# Altium PCB MSP432_MAIN.PcbDoc (part 2 of 2)
Units mil, origin at the board's own origin, x right, y up, seen from the top; angles counter-clockwise.
Board outline 3910 x 2910 mil, 2 copper layers (Top Layer, Bottom Layer); 62 components, 84 nets, 279 pads, 146 vias.
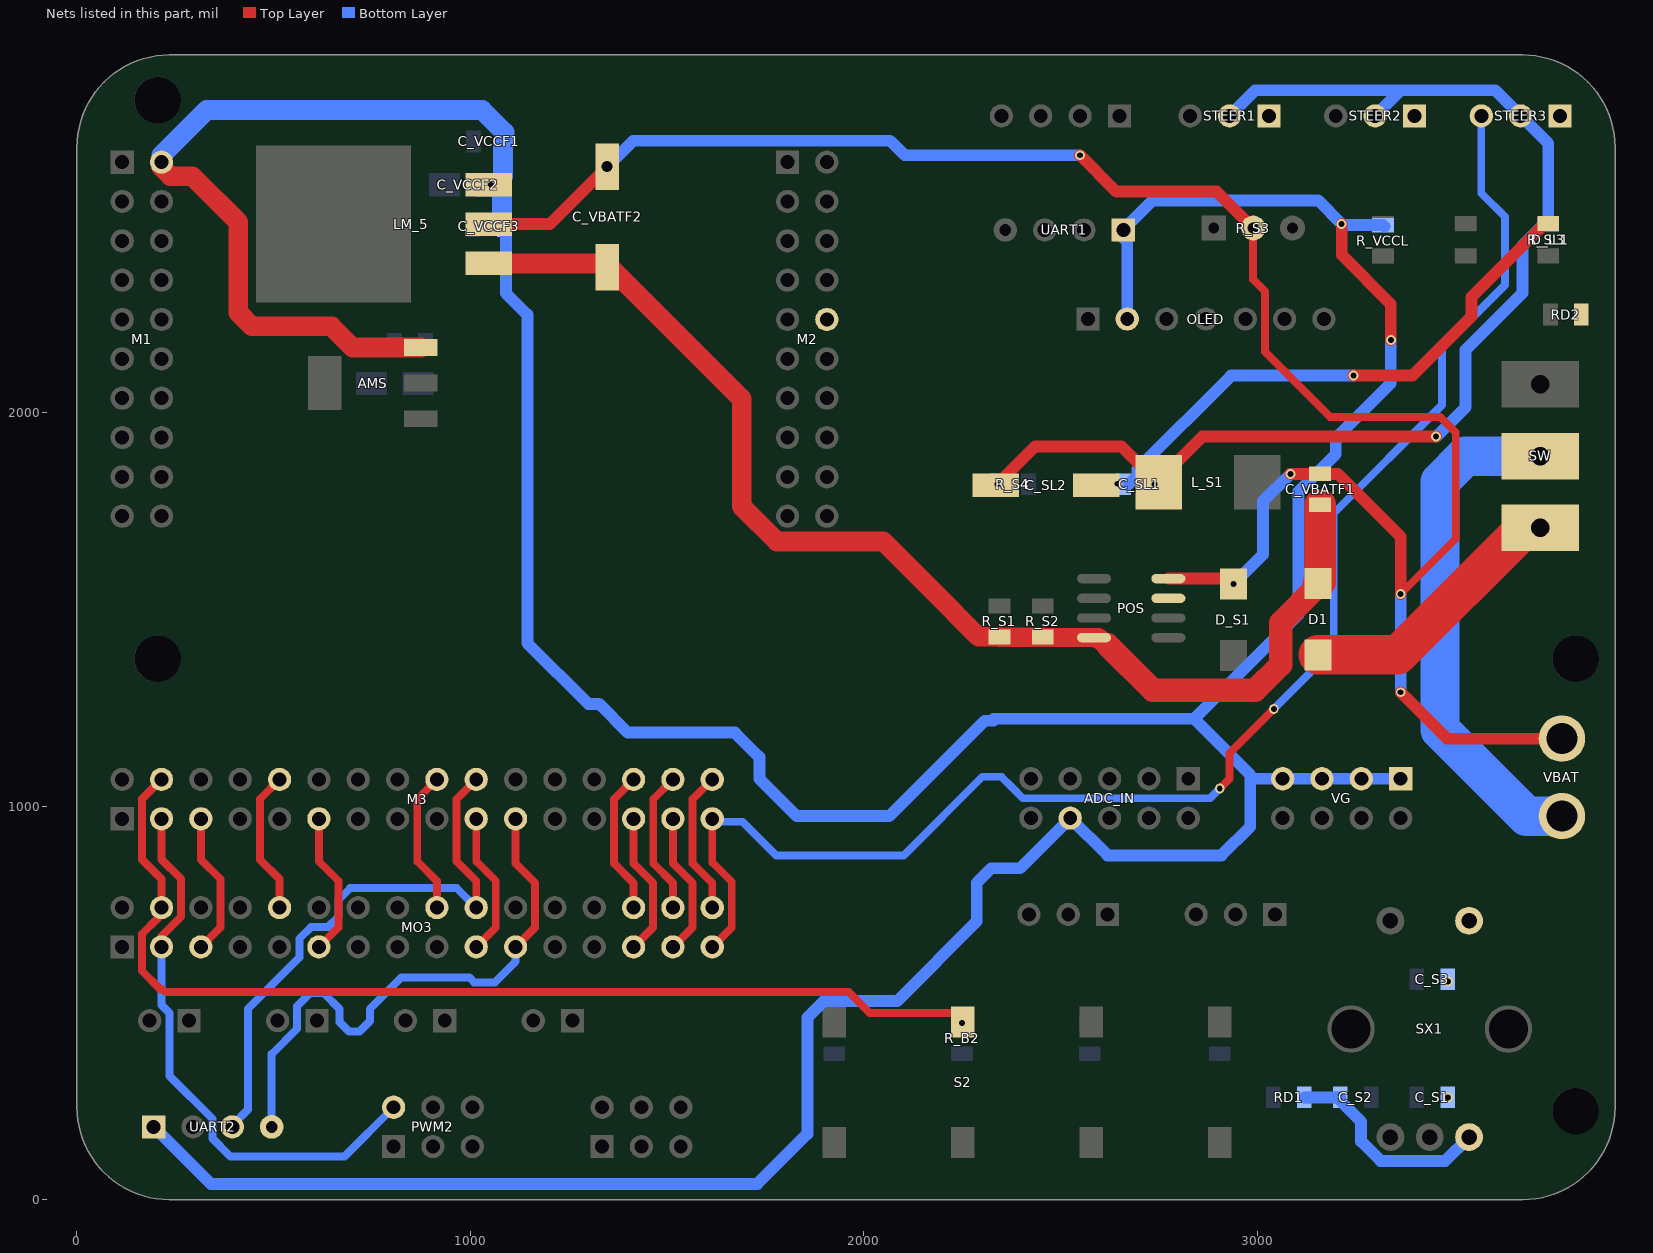
[diagram p2: the nets of this part, all layers, seen from the top]

## Via types
v1: diameter 25, hole 15, Top Layer to Bottom Layer, 145 vias
v2: diameter 50, hole 28, Top Layer to Bottom Layer, 1 vias

## Nets (pads, with @x,y where several pads share a name; then routed paths per layer and width w, separated by ;. In a path a pad name is that pad's centre, name@x,y a point inside that pad or via, vN(x,y) a via of type N, cw(c..) or ccw(c..) an arc to the next point about the centre after c; other vN are vias at no path point) (continued)
P8.7: M3.3 MO3.3 PWM2.2 | length 1438.5
  Top Layer w20: MO3.3@215,642.48 215,670 264.53,719.53 264.53,815.47 215,865 M3.3@215,968.19
  Bottom Layer w20: MO3.3@215,642.48 215,495.04 235.47,474.57 235.47,314.57 344.53,205.52 344.53,155.47 390,110 680,110 PWM2.2@805,235
P9.0: M3.4 MO3.4 R_B2.2 S2.1 | length 2687.9
  Top Layer w20: M3.4@215,1068.19 165.47,1018.66 165.47,864.53 215,815 MO3.4@215,742.48 207.53,735.01 207.53,717.53 165,675 165,582.02 212.49,534.53 217.94,534.53 224.97,527.5 1962.5,527.5 2015,475 2224.37,475 v1(2250,449.37)
P9.1: M3.5 MO3.5 | length 366.7
  Top Layer w20: MO3.5@315,642.48 364.53,692.01 364.53,815.47 315,865 M3.5@315,968.19
P9.2: M3.10 MO3.10 | length 367.1
  Top Layer w20: MO3.10@515,742.48 515,815 465,865 465,1018.19 M3.10@515,1068.19
P9.3: M3.11 MO3.11 | length 366.7
  Top Layer w20: MO3.11@615,642.48 664.53,692.01 664.53,810.47 615,860 M3.11@615,968.19
P9.4: M3.18 MO3.18 | length 367.1
  Top Layer w20: MO3.18@915,742.48 915,810 865,860 865,1018.19 M3.18@915,1068.19
P9.5: M3.19 MO3.19 | length 366.7
  Top Layer w20: MO3.19@1015,642.48 1064.53,692.01 1064.53,810.47 1015,860 M3.19@1015,968.19
P9.6: M3.20 MO3.20 UART2.3 | length 1464.1
  Top Layer w20: MO3.20@1015,742.48 1015,810 965,860 965,1018.19 M3.20@1015,1068.19
  Bottom Layer w20: UART2.3@395,185 395,189.18 435,229.18 435,485 565.47,615.47 565.47,663 595.43,692.95 637.95,692.95 664.53,719.53 664.53,762.05 694.49,792.01 965.47,792.01 MO3.20@1015,742.48
P9.7: M3.21 MO3.21 UART2.4 | length 1468.5
  Top Layer w20: MO3.21@1115,642.48 1164.53,692.01 1164.53,805.33 1115,854.86 M3.21@1115,968.19
  Bottom Layer w20: UART2.4@495,185 495,369.96 559.53,434.48 559.53,491.87 592.66,525 627.34,525 667.44,484.9 667.44,451.6 691.54,427.5 718.46,427.5 745,454.04 745,485 824.53,564.53 997.66,564.53 1009.69,552.5 1062.5,552.5 1115,605 MO3.21@1115,642.48
P10.0: M3.28 MO3.28 | length 367.1
  Top Layer w20: MO3.28@1415,742.48 1415,805 1365,855 1365,1018.19 M3.28@1415,1068.19
P10.1: M3.27 MO3.27 | length 366.7
  Top Layer w20: MO3.27@1415,642.48 1464.53,692.01 1464.53,805.47 1415,855 M3.27@1415,968.19
P10.2: M3.30 MO3.30 | length 367.1
  Top Layer w20: MO3.30@1515,742.48 1515,805 1465,855 1465,1018.19 M3.30@1515,1068.19
P10.3: M3.29 MO3.29 | length 366.7
  Top Layer w20: MO3.29@1515,642.48 1564.53,692.01 1564.53,805.47 1515,855 M3.29@1515,968.19
P10.4: M3.32 MO3.32 | length 367.1
  Top Layer w20: MO3.32@1615,742.48 1615,805 1565,855 1565,1018.19 M3.32@1615,1068.19
P10.5: M3.31 MO3.31 STEER3.3 | length 3846.1
  Top Layer w20: MO3.31@1615,642.48 1664.53,692.01 1664.53,807.9 1615,857.43 M3.31@1615,968.19 ; v1(2905,1045) 2930,1070 2930,1135 v1(3042.5,1247.5)
  Bottom Layer w20: M3.31@1615,968.19 1622.47,960.72 1691.86,960.72 1777.57,875 2101.46,875 2301.46,1075 2350,1075 2375.47,1049.53 ; 2375.47,1049.49 2404.49,1020.47 2880.47,1020.47 v1(2905,1045) ; v1(3042.5,1247.5) 3195,1400 3195,1745 3470,2020 3470,2165 3630,2325 3630,2498.5 3570,2558.5 STEER3.3@3570,2755
RST: M2.10
STEERGND: C_SL1.1 C_SL2.2 D_L3.2 RD2.1 STEER1.1 STEER2.1 STEER3.1 | length 1392.8
  Top Layer w30: v1(3245,2095) 3395,2095 3545.28,2245.28 3545.28,2295 3731.62,2481.34 D_L3.2@3740.48,2481.34
  Bottom Layer w30: C_SL1.1@2660.63,1818.7 2673.7,1818.7 2695.67,1840.67 2695.67,1856.62 2934.05,2095 v1(3245,2095)
  other v1: 2645,1820
VBAT: C_VBATF1.2 C_VBATF2.1 D1.2 LM_5.1 POS.4 R_S1.1 R_S2.1 | length 3088.5
  Top Layer w40: POS.4@2585.51,1428.7 POS.4@2596.3,1428.7
  Top Layer w50: LM_5.1@1046.48,2380 1345.47,2380 1690,2035.47 1690,1762.56 1779.61,1672.95 2049.87,1672.95 2230.32,1492.5 ; 2232.5,1490.32 2292.2,1430.63 R_S1.1@2345,1430.63 ; R_S1.1@2345,1429.33 2455,1429.33 POS.4@2585.51,1428.7 ; POS.4@2596.3,1428.7 2615,1410
  Top Layer w60: 2620,1410 2735,1295 2995,1295 3060,1360 3060,1466.18 3155,1561.18 D1.2@3155,1566.1
  Top Layer w80: D1.2@3155,1566.1 3160,1571.1 C_VBATF1.2@3160,1766.26
VBATGND: C_S1.1 C_S2.1 C_S3.1 C_VBATF1.1 C_VBATF2.2 D_S1.1 LM_5.2 POS.7 POS.8 R_S3.2 RD1.1 SX1.1 SX1.4 VBAT.2 | length 5745.1
  Top Layer w20: R_S3.2@2990,2470 2990,2339.18 3020,2309.18 3020,2155.5 3185.5,1990 3465,1990 3505,1950 3505,1680 v1(3365,1540)
  Top Layer w30: LM_5.2@1046.48,2480 1201.78,2480 v2(1347.8,2626.03) ; v1(2550,2655) 2642.52,2562.48 2897.52,2562.48 R_S3.2@2990,2470 ; POS.8@2774.49,1578.7 2926.3,1578.7 v1(2940,1565) ; v1(3085,1845) C_VBATF1.1@3160,1845 3205,1845 3365,1685 v1(3365,1540) ; v1(3365,1290) 3483.15,1171.85 VBAT.2@3775,1171.85
  Bottom Layer w30: v2(1347.8,2626.03) 1413.78,2692.01 2067.22,2692.01 2104.23,2655 v1(2550,2655) ; v1(2940,1565) 3015,1640 3015,1775 v1(3085,1845) ; RD1.1@3120,260 C_S2.1@3211.26,260 3211.26,251.14 3264.43,197.97 3264.43,148.04 3313.9,98.57 3478.5,98.57 SX1.1@3538.94,159 ; v1(3365,1290) v1(3365,1540)
  other v1: 3485,260 3485,555
VCC: ADC_IN.8 AMS.3 C_VCCF1.2 C_VCCF2.1 C_VCCF3.2 LM_5.3 M1.2 OLED.2 R_VCCL.2 UART1.1 UART2.1 VG.1 VG.3 VG.5 VG.7 | length 12004.8
  Top Layer w30: v1(3215,2480) 3215,2401.57 3340,2276.57 v1(3340,2185)
  Top Layer w50: M1.2@215,2637.48 215,2625 237.99,2602.01 292.99,2602.01 410,2485 410,2255 445,2220 647.13,2220 700.98,2166.15 AMS.3@873.98,2166.15
  Bottom Layer w30: UART2.1@195,185 340,40 1730,40 1857.01,167.01 1857.01,462.99 1899.01,505 2085,505 2287.5,707.5 2287.5,805.53 2324.47,842.5 2397.5,842.5 ADC_IN.8@2525,970 2620,875 2909.5,875 2982.5,948 2982.5,1080 2840,1222.5 ; C_VCCF3.2@1086.85,2475 1086.85,2466.14 1090.55,2462.44 1090.55,2304.45 1145,2250 1145,1414.89 1299.56,1260.33 1327.25,1260.33 1400.08,1187.5 1672.5,1187.5 1735,1125 1735,1070 1830,975 2065,975 2307.5,1217.5 2330,1217.5 ; 2330,1222.5 2840,1222.5 ; OLED.2@2670,2238.7 2670,2435 2660,2445 UART1.1@2660,2465 2735,2540 3155,2540 v1(3215,2480) 3217.6,2477.4 R_VCCL.2@3320,2477.4 R_VCCL.2@3323.7,2473.7 ; 2990,1070 VG.7@3065,1070 VG.5@3165,1070 VG.3@3265,1070 VG.1@3365,1070 ; v1(3340,2185) 3340,2075 3200,1935 3200,1895 3105,1800 3105,1487.5 2840,1222.5
  Bottom Layer w50: M1.2@215,2637.48 215,2655 330,2770 1030,2770 1086.85,2713.15 C_VCCF1.2@1086.85,2690 ; v1(1052.48,2580) 1062.32,2580 1083.11,2600.79 C_VCCF1.2@1083.11,2690 ; C_VCCF2.1@1080.55,2561.77 1080.55,2477.56 1083.11,2475 C_VCCF3.2@1086.85,2475
VCC_STEER: C_SL1.2 C_SL2.1 L_S1.2 R_S4.1 R_SL1.2 STEER1.2 STEER2.2 STEER3.2 | length 3107.8
  Top Layer w30: v1(2340,1818.7) 2436.3,1915 2655,1915 2739.37,1830.63 v1(2739.37,1818.7) 2860.67,1940 v1(3455,1940)
  Bottom Layer w30: STEER1.2@2930,2755 2995,2820 3365,2820 ; STEER2.2@3300,2755 3365,2820 ; v1(3455,1940) 3530,2015 3530,2160 3675,2305 3675,2425.78 3731.62,2482.4 R_SL1.2@3740,2482.4 ; R_SL1.2@3740,2479.37 R_SL1.2@3740,2482.4 ; 3365,2820 3605,2820 STEER3.2@3670,2755 3740,2685 R_SL1.2@3740,2482.4
VINBAT: D1.1 SW.1 | length 698.8
  Top Layer w100: D1.1@3155,1385 3357.63,1385 3680.63,1708 SW.1@3720,1708
VINNBAT: SW.2 VBAT.1 | length 1313.1
  Bottom Layer w100: SW.2@3720,1890 3530,1890 3465,1825 3465,1195 3685,975 VBAT.1@3775,975
pads on no net: AMS.4 LM_5.4 R_S3.1 SW.3 SX1.6 SX1.7
copper on no net: | length 11775.9
  Top Layer w1.66: 642.28,1233.38 692.08,1233.38 ; 642.28,1235.04 693.74,1235.04 ; 642.28,1236.7 695.41,1236.7 ; 642.28,1238.36 695.41,1238.36 ; 642.28,1240.02 697.07,1240.02 ; 642.28,1241.68 657.22,1241.68 ; 642.28,1243.34 658.88,1243.34 ; 643.94,1230.06 687.1,1230.06 ; 643.94,1231.72 690.42,1231.72 ; 643.94,1245 662.2,1245 ; 643.94,1246.66 663.86,1246.66 ; 645.6,1228.4 683.78,1228.4 ; 645.6,1248.32 667.18,1248.32 ; 647.26,1226.74 678.8,1226.74 ; 647.26,1249.98 668.84,1249.98 ; 648.92,1251.64 672.16,1251.64 ; 650.58,1253.3 673.82,1253.3 ; 650.58,1254.96 677.14,1254.96 ; 652.24,1225.08 663.86,1225.08 ; 653.9,1256.62 678.8,1256.62 ; 653.9,1274.88 668.84,1274.88 ; 653.9,1276.54 675.48,1276.54 ; 653.9,1278.2 678.8,1278.2 ; 653.9,1279.86 678.8,1279.86 ; 653.9,1281.53 677.14,1281.53 ; 653.9,1283.19 668.84,1283.19 ; 653.9,1284.85 670.5,1284.85 ; 655.56,1258.28 682.12,1258.28 ; 655.56,1286.51 673.82,1286.51 ; 655.56,1288.17 675.48,1288.17 ; 655.56,1289.83 680.46,1289.83 ; 657.22,1259.94 685.44,1259.94 ; 657.22,1291.49 683.78,1291.49 ; 657.22,1293.15 690.42,1293.15 ; 658.88,1261.6 687.1,1261.6 ; 658.88,1294.81 710.35,1294.81 ; 658.88,1296.47 710.35,1296.47 ; 660.54,1263.26 690.42,1263.26 ; 660.54,1298.13 708.69,1298.13 ; 662.2,1299.79 708.69,1299.79 ; 663.86,1241.68 697.07,1241.68 ; 663.86,1264.92 692.08,1264.92 ; 665.52,1266.58 695.41,1266.58 ; 665.52,1301.45 708.69,1301.45 ; 668.84,1268.24 697.07,1268.24 ; 670.5,1303.11 707.03,1303.11 ; 672.16,1243.34 697.07,1243.34 ; 672.16,1269.9 700.39,1269.9 ; 675.48,1271.56 702.05,1271.56 ; 675.48,1304.77 707.03,1304.77 ; 677.14,1273.22 703.71,1273.22 ; 680.46,1245 698.73,1245 ; 680.46,1274.88 705.37,1274.88 ; 683.78,1276.54 707.03,1276.54 ; 683.78,1306.43 705.37,1306.43 ; 685.44,1278.2 707.03,1278.2 ; 687.1,1246.66 697.07,1246.66 ; 688.76,1279.86 708.69,1279.86 ; 690.42,1281.53 708.69,1281.53 ; 692.08,1283.19 710.35,1283.19 ; 693.74,1284.85 710.35,1284.85 ; 695.41,1286.51 710.35,1286.51 ; 697.07,1288.17 710.35,1288.17 ; 697.07,1293.15 710.35,1293.15 ; 698.73,1289.83 710.35,1289.83 ; 698.73,1291.49 710.35,1291.49 ; 702.05,1240.02 716.99,1240.02 ; 702.05,1241.68 716.99,1241.68 ; 702.05,1243.34 716.99,1243.34 ; 702.05,1245 716.99,1245 ; 702.05,1246.66 716.99,1246.66 ; 702.05,1248.32 716.99,1248.32 ; 702.05,1249.98 716.99,1249.98 ; 702.05,1251.64 716.99,1251.64 ; 702.05,1253.3 718.65,1253.3 ; 702.05,1254.96 718.65,1254.96 ; 702.05,1256.62 718.65,1256.62 ; 702.05,1258.28 720.31,1258.28 ; 703.71,1236.7 745.21,1236.7 ; 703.71,1238.36 718.65,1238.36 ; 703.71,1259.94 720.31,1259.94 ; 703.71,1261.6 721.97,1261.6 ; 703.71,1263.26 721.97,1263.26 ; 705.37,1233.38 741.89,1233.38 ; 705.37,1235.04 743.55,1235.04 ; 705.37,1264.92 723.63,1264.92 ; 705.37,1266.58 723.63,1266.58 ; 705.37,1268.24 725.29,1268.24 ; 707.03,1231.72 740.23,1231.72 ; 707.03,1269.9 726.95,1269.9 ; 707.03,1271.56 726.95,1271.56 ; 708.69,1230.06 736.91,1230.06 ; 708.69,1273.22 728.61,1273.22 ; 710.35,1228.4 735.25,1228.4 ; 710.35,1274.88 730.27,1274.88 ; 710.35,1276.54 730.27,1276.54 ; 712.01,1278.2 731.93,1278.2 ; 713.67,1226.74 730.27,1226.74 ; 713.67,1279.86 733.59,1279.86 ; 713.67,1281.53 735.25,1281.53 ; 715.33,1283.19 736.91,1283.19 ; 716.99,1284.85 738.57,1284.85 ; 718.65,1286.51 741.89,1286.51 ; 718.65,1288.17 748.53,1288.17 ; 720.31,1238.36 746.87,1238.36 ; 720.31,1289.83 750.19,1289.83 ; 721.97,1291.49 753.51,1291.49 ; 723.63,1240.02 748.53,1240.02 ; 723.63,1293.15 768.46,1293.15 ; 726.95,1241.68 750.19,1241.68 ; 726.95,1294.81 768.46,1294.81 ; 728.61,1243.34 751.85,1243.34 ; 728.61,1296.47 766.8,1296.47 ; 730.27,1298.13 766.8,1298.13 ; 731.93,1245 753.51,1245 ; 731.93,1299.79 765.13,1299.79 ; 733.59,1246.66 755.17,1246.66 ; 735.25,1248.32 755.17,1248.32 ; 735.25,1301.45 763.47,1301.45 ; 736.91,1249.98 756.83,1249.98 ; 738.57,1251.64 758.49,1251.64 ; 738.57,1303.11 761.81,1303.11 ; 740.23,1253.3 758.49,1253.3 ; 741.89,1254.96 760.15,1254.96 ; 741.89,1304.77 761.81,1304.77 ; 743.55,1256.62 760.15,1256.62 ; 745.21,1258.28 761.81,1258.28 ; 745.21,1259.94 761.81,1259.94 ; 746.87,1261.6 763.47,1261.6 ; 746.87,1306.43 758.49,1306.43 ; 748.53,1263.26 763.47,1263.26 ; 748.53,1264.92 765.13,1264.92 ; 750.19,1266.58 765.13,1266.58 ; 751.85,1268.24 765.13,1268.24 ; 751.85,1269.9 766.8,1269.9 ; 753.51,1271.56 766.8,1271.56 ; 753.51,1273.22 766.8,1273.22 ; 753.51,1274.88 768.46,1274.88 ; 755.17,1276.54 768.46,1276.54 ; 755.17,1278.2 768.46,1278.2 ; 755.17,1279.86 768.46,1279.86 ; 756.83,1281.53 768.46,1281.53 ; 756.83,1283.19 768.46,1283.19 ; 756.83,1284.85 768.46,1284.85 ; 756.83,1286.51 768.46,1286.51 ; 756.83,1288.17 768.46,1288.17 ; 756.83,1289.83 768.46,1289.83 ; 756.83,1291.49 768.46,1291.49 ; 761.81,1233.38 811.62,1233.38 ; 761.81,1235.04 813.28,1235.04 ; 761.81,1236.7 814.94,1236.7 ; 761.81,1238.36 814.94,1238.36 ; 761.81,1240.02 816.6,1240.02 ; 761.81,1241.68 776.76,1241.68 ; 761.81,1243.34 778.42,1243.34 ; 763.47,1230.06 806.64,1230.06 ; 763.47,1231.72 809.96,1231.72 ; 763.47,1245 781.74,1245 ; 763.47,1246.66 783.4,1246.66 ; 765.13,1228.4 803.32,1228.4 ; 765.13,1248.32 786.72,1248.32 ; 766.8,1226.74 798.34,1226.74 ; 766.8,1249.98 788.38,1249.98 ; 768.46,1251.64 791.7,1251.64 ; 770.12,1253.3 793.36,1253.3 ; 770.12,1254.96 796.68,1254.96 ; 771.78,1225.08 783.4,1225.08 ; 773.44,1256.62 798.34,1256.62 ; 773.44,1274.88 788.38,1274.88 ; 773.44,1276.54 795.02,1276.54 ; 773.44,1278.2 798.34,1278.2 ; 773.44,1279.86 798.34,1279.86 ; 773.44,1281.53 796.68,1281.53 ; 773.44,1283.19 788.38,1283.19 ; 773.44,1284.85 790.04,1284.85 ; 775.1,1258.28 801.66,1258.28 ; 775.1,1286.51 793.36,1286.51 ; 775.1,1288.17 795.02,1288.17 ; 775.1,1289.83 800,1289.83 ; 776.76,1259.94 804.98,1259.94 ; 776.76,1291.49 803.32,1291.49 ; 776.76,1293.15 809.96,1293.15 ; 778.42,1261.6 806.64,1261.6 ; 778.42,1294.81 829.88,1294.81 ; 778.42,1296.47 829.88,1296.47 ; 780.08,1263.26 809.96,1263.26 ; 780.08,1298.13 828.22,1298.13 ; 781.74,1299.79 828.22,1299.79 ; 783.4,1241.68 816.6,1241.68 ; 783.4,1264.92 811.62,1264.92 ; 785.06,1266.58 814.94,1266.58 ; 785.06,1301.45 828.22,1301.45 ; 788.38,1268.24 816.6,1268.24 ; 790.04,1303.11 826.56,1303.11 ; 791.7,1243.34 816.6,1243.34 ; 791.7,1269.9 819.92,1269.9 ; 795.02,1271.56 821.58,1271.56 ; 795.02,1304.77 826.56,1304.77 ; 796.68,1273.22 823.24,1273.22 ; 800,1245 818.26,1245 ; 800,1274.88 824.9,1274.88 ; 803.32,1276.54 826.56,1276.54 ; 803.32,1306.43 824.9,1306.43 ; 804.98,1278.2 826.56,1278.2 ; 806.64,1246.66 816.6,1246.66 ; 808.3,1279.86 828.22,1279.86 ; 809.96,1281.53 828.22,1281.53 ; 811.62,1283.19 829.88,1283.19 ; 813.28,1284.85 829.88,1284.85 ; 814.94,1286.51 829.88,1286.51 ; 816.6,1288.17 829.88,1288.17 ; 816.6,1293.15 829.88,1293.15 ; 818.26,1289.83 829.88,1289.83 ; 818.26,1291.49 829.88,1291.49 ; 821.58,1240.02 836.53,1240.02 ; 821.58,1241.68 836.53,1241.68 ; 821.58,1243.34 836.53,1243.34 ; 821.58,1245 836.53,1245 ; 821.58,1246.66 836.53,1246.66 ; 821.58,1248.32 836.53,1248.32 ; 821.58,1249.98 836.53,1249.98 ; 821.58,1251.64 836.53,1251.64 ; 821.58,1253.3 838.19,1253.3 ; 821.58,1254.96 838.19,1254.96 ; 821.58,1256.62 838.19,1256.62 ; 821.58,1258.28 839.85,1258.28 ; 823.24,1236.7 864.75,1236.7 ; 823.24,1238.36 838.19,1238.36 ; 823.24,1259.94 839.85,1259.94 ; 823.24,1261.6 841.51,1261.6 ; 823.24,1263.26 841.51,1263.26 ; 824.9,1233.38 861.43,1233.38 ; 824.9,1235.04 863.09,1235.04 ; 824.9,1264.92 843.17,1264.92 ; 824.9,1266.58 843.17,1266.58 ; 824.9,1268.24 844.83,1268.24 ; 826.56,1231.72 859.77,1231.72 ; 826.56,1269.9 846.49,1269.9 ; 826.56,1271.56 846.49,1271.56 ; 828.22,1230.06 856.45,1230.06 ; 828.22,1273.22 848.15,1273.22 ; 829.88,1228.4 854.79,1228.4 ; 829.88,1274.88 849.81,1274.88 ; 829.88,1276.54 849.81,1276.54 ; 831.54,1278.2 851.47,1278.2 ; 833.2,1226.74 849.81,1226.74 ; 833.2,1279.86 853.13,1279.86 ; 833.2,1281.53 854.79,1281.53 ; 834.86,1283.19 856.45,1283.19 ; 836.53,1284.85 858.11,1284.85 ; 838.19,1286.51 861.43,1286.51 ; 838.19,1288.17 868.07,1288.17 ; 839.85,1238.36 866.41,1238.36 ; 839.85,1289.83 869.73,1289.83 ; 841.51,1291.49 873.05,1291.49 ; 843.17,1240.02 868.07,1240.02 ; 843.17,1293.15 887.99,1293.15 ; 846.49,1241.68 869.73,1241.68 ; 846.49,1294.81 887.99,1294.81 ; 848.15,1243.34 871.39,1243.34 ; 848.15,1296.47 886.33,1296.47 ; 849.81,1298.13 886.33,1298.13 ; 851.47,1245 873.05,1245 ; 851.47,1299.79 884.67,1299.79 ; 853.13,1246.66 874.71,1246.66 ; 854.79,1248.32 874.71,1248.32 ; 854.79,1301.45 883.01,1301.45 ; 856.45,1249.98 876.37,1249.98 ; 858.11,1251.64 878.03,1251.64 ; 858.11,1303.11 881.35,1303.11 ; 859.77,1253.3 878.03,1253.3 ; 861.43,1254.96 879.69,1254.96 ; 861.43,1304.77 881.35,1304.77 ; 863.09,1256.62 879.69,1256.62 ; 864.75,1258.28 881.35,1258.28 ; 864.75,1259.94 881.35,1259.94 ; 866.41,1261.6 883.01,1261.6 ; 866.41,1306.43 878.03,1306.43 ; 868.07,1263.26 883.01,1263.26 ; 868.07,1264.92 884.67,1264.92 ; 869.73,1266.58 884.67,1266.58 ; 871.39,1268.24 884.67,1268.24 ; 871.39,1269.9 886.33,1269.9 ; 873.05,1271.56 886.33,1271.56 ; 873.05,1273.22 886.33,1273.22 ; 873.05,1274.88 887.99,1274.88 ; 874.71,1276.54 887.99,1276.54 ; 874.71,1278.2 887.99,1278.2 ; 874.71,1279.86 887.99,1279.86 ; 876.37,1281.53 887.99,1281.53 ; 876.37,1283.19 887.99,1283.19 ; 876.37,1284.85 887.99,1284.85 ; 876.37,1286.51 887.99,1286.51 ; 876.37,1288.17 887.99,1288.17 ; 876.37,1289.83 887.99,1289.83 ; 876.37,1291.49 887.99,1291.49
  Top Layer w2.04: 322.59,1255.72 363.39,1255.72 ; 322.59,1257.76 365.43,1257.76 ; 322.59,1259.8 367.47,1259.8 ; 322.59,1261.84 342.99,1261.84 ; 322.59,1263.88 342.99,1263.88 ; 322.59,1265.92 340.95,1265.92 ; 322.59,1267.96 340.95,1267.96 ; 322.59,1270 340.95,1270 ; 322.59,1272.04 345.03,1272.04 ; 322.59,1274.08 351.15,1274.08 ; 322.59,1276.12 355.23,1276.12 ; 322.59,1278.16 357.27,1278.16 ; 324.63,1251.64 357.27,1251.64 ; 324.63,1253.68 361.35,1253.68 ; 324.63,1280.2 361.35,1280.2 ; 324.63,1282.24 363.39,1282.24 ; 326.67,1249.6 355.23,1249.6 ; 326.67,1284.28 345.03,1284.28 ; 328.71,1247.56 351.15,1247.56 ; 328.71,1286.32 347.07,1286.32 ; 328.71,1288.36 349.11,1288.36 ; 330.75,1290.4 351.15,1290.4 ; 332.79,1292.44 353.19,1292.44 ; 334.83,1294.48 355.23,1294.48 ; 336.87,1296.52 373.59,1296.52 ; 338.91,1298.56 375.63,1298.56 ; 342.99,1300.6 375.63,1300.6 ; 347.07,1302.64 373.59,1302.64 ; 349.11,1284.28 367.47,1284.28 ; 351.15,1261.84 369.51,1261.84 ; 351.15,1286.32 369.51,1286.32 ; 351.15,1304.68 371.55,1304.68 ; 353.19,1288.36 369.51,1288.36 ; 353.19,1290.4 371.55,1290.4 ; 355.23,1263.88 371.55,1263.88 ; 355.23,1292.44 373.59,1292.44 ; 357.27,1265.92 373.59,1265.92 ; 357.27,1294.48 373.59,1294.48 ; 357.27,1306.72 367.47,1306.72 ; 361.35,1267.96 375.63,1267.96 ; 363.39,1270 375.63,1270 ; 365.43,1272.04 375.63,1272.04 ; 369.51,1274.08 373.59,1274.08 ; 393.99,1247.56 414.4,1247.56 ; 393.99,1249.6 416.44,1249.6 ; 393.99,1251.64 416.44,1251.64 ; 393.99,1253.68 416.44,1253.68 ; 393.99,1255.72 416.44,1255.72 ; 393.99,1257.76 418.48,1257.76 ; 393.99,1259.8 420.52,1259.8 ; 396.04,1245.52 414.4,1245.52 ; 396.04,1261.84 420.52,1261.84 ; 398.08,1241.44 412.36,1241.44 ; 398.08,1243.48 412.36,1243.48 ; 398.08,1263.88 438.88,1263.88 ; 398.08,1265.92 438.88,1265.92 ; 400.12,1239.4 410.32,1239.4 ; 400.12,1267.96 418.48,1267.96 ; 400.12,1270 418.48,1270 ; 400.12,1310.8 442.96,1310.8 ; 400.12,1312.84 442.96,1312.84 ; 400.12,1314.88 445,1314.88 ; 400.12,1316.92 445,1316.92 ; 400.12,1318.96 445,1318.96 ; 402.16,1272.04 418.48,1272.04 ; 402.16,1274.08 418.48,1274.08 ; 402.16,1276.12 436.84,1276.12 ; 402.16,1278.16 436.84,1278.16 ; 402.16,1304.68 418.48,1304.68 ; 402.16,1306.72 422.56,1306.72 ; 402.16,1308.76 442.96,1308.76 ; 402.16,1321 445,1321 ; 404.2,1280.2 434.8,1280.2 ; 406.24,1282.24 412.36,1282.24 ; 412.36,1345.49 438.88,1345.49 ; 412.36,1347.53 436.84,1347.53 ; 412.36,1349.57 430.72,1349.57 ; 412.36,1351.61 420.52,1351.61 ; 414.4,1282.24 432.76,1282.24 ; 414.4,1343.45 440.92,1343.45 ; 416.44,1284.28 426.64,1284.28 ; 416.44,1341.41 442.96,1341.41 ; 418.48,1323.05 453.16,1323.05 ; 418.48,1337.33 442.96,1337.33 ; 418.48,1339.37 442.96,1339.37 ; 420.52,1267.96 436.84,1267.96 ; 420.52,1270 436.84,1270 ; 420.52,1272.04 436.84,1272.04 ; 420.52,1274.08 436.84,1274.08 ; 420.52,1333.25 445,1333.25 ; 420.52,1335.29 445,1335.29 ; 422.56,1259.8 440.92,1259.8 ; 422.56,1261.84 438.88,1261.84 ; 422.56,1325.09 500.09,1325.09 ; 422.56,1327.13 500.09,1327.13 ; 422.56,1329.17 500.09,1329.17 ; 422.56,1331.21 498.05,1331.21 ; 424.6,1255.72 445,1255.72 ; 424.6,1257.76 442.96,1257.76 ; 424.6,1290.4 434.8,1290.4 ; 424.6,1306.72 442.96,1306.72 ; 426.64,1253.68 449.08,1253.68 ; 426.64,1292.44 442.96,1292.44 ; 426.64,1304.68 442.96,1304.68 ; 428.68,1251.64 506.21,1251.64 ; 428.68,1300.6 459.28,1300.6 ; 428.68,1302.64 440.92,1302.64 ; 430.72,1249.6 508.25,1249.6 ; 430.72,1294.48 449.08,1294.48 ; 432.76,1247.56 510.29,1247.56 ; 432.76,1296.52 453.16,1296.52 ; 434.8,1245.52 510.29,1245.52 ; 436.84,1298.56 457.24,1298.56 ; 438.88,1243.48 510.29,1243.48 ; 442.96,1241.44 508.25,1241.44 ; 442.96,1272.04 483.76,1272.04 ; 442.96,1274.08 481.72,1274.08 ; 442.96,1276.12 479.68,1276.12 ; 442.96,1278.16 477.64,1278.16 ; 442.96,1302.64 461.32,1302.64 ; 445,1267.96 469.48,1267.96 ; 445,1270 469.48,1270 ; 445,1280.2 477.64,1280.2 ; 445,1282.24 477.64,1282.24 ; 445,1284.28 479.68,1284.28 ; 445,1286.32 463.36,1286.32 ; 445,1288.36 461.32,1288.36 ; 445,1304.68 463.36,1304.68 ; 447.04,1265.92 467.44,1265.92 ; 447.04,1290.4 457.24,1290.4 ; 447.04,1306.72 465.4,1306.72 ; 447.04,1308.76 467.44,1308.76 ; 449.08,1239.4 498.05,1239.4 ; 449.08,1263.88 467.44,1263.88 ; 449.08,1310.8 469.48,1310.8 ; 451.12,1312.84 469.48,1312.84 ; 451.12,1314.88 471.52,1314.88 ; 453.16,1261.84 467.44,1261.84 ; 453.16,1316.92 471.52,1316.92 ; 453.16,1318.96 471.52,1318.96 ; 453.16,1333.25 498.05,1333.25 ; 453.16,1353.65 479.68,1353.65 ; 453.16,1355.69 477.64,1355.69 ; 455.2,1259.8 467.44,1259.8 ; 455.2,1321 473.56,1321 ; 455.2,1323.05 498.05,1323.05 ; 455.2,1351.61 481.72,1351.61 ; 455.2,1357.73 475.6,1357.73 ; 457.24,1335.29 496,1335.29 ; 457.24,1347.53 481.72,1347.53 ; 457.24,1349.57 481.72,1349.57 ; 457.24,1359.77 471.52,1359.77 ; 459.28,1337.33 487.84,1337.33 ; 459.28,1339.37 477.64,1339.37 ; 459.28,1341.41 479.68,1341.41 ; 459.28,1343.45 479.68,1343.45 ; 459.28,1345.49 481.72,1345.49 ; 467.44,1286.32 481.72,1286.32 ; 471.52,1267.96 487.84,1267.96 ; 471.52,1270 485.8,1270 ; 471.52,1288.36 483.76,1288.36 ; 473.56,1253.68 506.21,1253.68 ; 473.56,1261.84 493.96,1261.84 ; 473.56,1263.88 491.92,1263.88 ; 473.56,1265.92 489.88,1265.92 ; 473.56,1290.4 483.76,1290.4 ; 475.6,1255.72 502.13,1255.72 ; 475.6,1257.76 500.09,1257.76 ; 475.6,1259.8 496,1259.8 ; 475.6,1292.44 510.29,1292.44 ; 475.6,1294.48 508.25,1294.48 ; 477.64,1296.52 506.21,1296.52 ; 481.72,1298.56 504.17,1298.56 ; 481.72,1300.6 496,1300.6 ; 485.8,1282.24 514.37,1282.24 ; 485.8,1284.28 514.37,1284.28 ; 485.8,1286.32 514.37,1286.32 ; 487.84,1280.2 512.33,1280.2 ; 487.84,1288.36 512.33,1288.36 ; 487.84,1290.4 512.33,1290.4 ; 491.92,1278.16 512.33,1278.16
  other v1: 535,2400 652.5,2400 770,2400 535,2485 652.5,2485 770,2485 535,2570 652.5,2570 770,2570

## Polygon pours and split planes (outlines as drawn)
GND on Top Layer "Top Layer-GND" (solid, remove dead copper, pour order 6): -380,2640 210,3230 3735,3230 4545,2420 4545,670 3455,-420 3330,-295 -90,-295 -90,605 -290,805
VBATGND on Top Layer "Top Layer-VBATGND" (solid, remove dead copper, pour order 4): 3110,-20 3110,765 3200,855 3585,855 3635,905 3635,1230 3690,1285 3925,1285 3925,45 3845,-35
no net on Top Layer "Top Layer-No Net" (solid, pour order 2): 3060,15
STEERGND on Top Layer "Top Layer-STEERGND" (solid, remove dead copper, pour order 0): 2655,2620 2720,2685 2720,2915 3810,2915 3965,2760 3955,2205 3780,2205 3780,2280 3670,2390 3670,2590 3580,2680 3480,2580 2650,2580
GND on Bottom Layer "Bottom Layer-GND" (solid, remove dead copper, pour order 8): -90,2805 785,3680 3450,3680 4855,2275 4300,1720 4300,-495 425,-495 -65,-5

## Keep-outs
Keep-Out Layer:
  the board outline again, w10

## Other copper
Top Layer:
  rectangle net VBATGND: 2735,1525 2815,1590
  pour cut-out: 3605,2170 3825,2170 3860,2135 3860,2010 3835,1985 3605,1985 3580,2010 3580,2140
Bottom Layer:
  pour cut-out: 3605,2172.5 3825,2172.5 3860,2137.5 3860,2012.5 3835,1987.5 3605,1987.5 3580,2012.5 3580,2142.5

## Silkscreen, mask and mechanical layers (free items; w line width, h text height)
Top Overlay:
  text "P6.4" at 2315,2670 h19.68
  text "P6.5" at 2415,2670 h19.68
  text "GND" at 2525,2670 h19.68
  text "3.3V" at 2620,2670 h19.68
  text "P5.6" at 2795,2670 h19.68
  text "V_STR" at 2890,2670 h19.68
  text "GND" at 3005,2670 h19.68
  text "P5.7" at 3165,2670 h19.68
  text "V_STR" at 3260,2670 h19.68
  text "GND" at 3375,2670 h19.68
  text "P10.1" at 3535,2670 h19.68
  text "V_STR" at 3630,2670 h19.68
  text "GND" at 3745,2670 h19.68
  text "VCC" at 300,2610 h19.68 r90
  text "GND" at 1995,2610 h19.68 r90
  text "3.3V" at 45,2600 h19.68 r90
  text "P2.7" at 1735,2600 h19.68 r90
  text "P3.3" at 2330,2380 h19.68
  text "P3.2" at 2430,2380 h19.68
  text "GND" at 2535,2380 h19.68
  text "VCC" at 2635,2380 h19.68
  text "GND" at 2540,2155 h19.68
  text "VCC" at 2640,2155 h19.68
  text "VCC" at 3035,1140 h19.68
  text "VCC" at 3140,1140 h19.68
  text "VCC" at 3240,1140 h19.68
  text "VCC" at 3340,1140 h19.68
  text "P4.7" at 2390,1135 h19.68
  text "P4.5" at 2485,1135 h19.68
  text "GND" at 2595,1135 h19.68
  text "P4.4" at 2685,1135 h19.68
  text "P4.2" at 2790,1135 h19.68
  text "P8.5" at 40,1045 h19.68 r90
  text "P8.6" at 40,935 h19.68 r90
  text "VCC" at 2500,885 h19.68
  text "GND" at 2600,885 h19.68
  text "3.3V" at 2695,885 h19.68
  text "P4.0" at 2795,885 h19.68
  text "GND" at 3040,885 h19.68
  text "GND" at 3135,885 h19.68
  text "GND" at 3240,885 h19.68
  text "GND" at 3340,885 h19.68
  text "P4.1" at 2390,880 h19.68
  text "P8.5" at 80,805 h19.68
  text "P9.0" at 180,805 h19.68
  text "P8.4" at 280,805 h19.68
  text "P8.1" at 385,805 h19.68
  text "P9.2" at 485,805 h19.68
  text "P6.2" at 590,805 h19.68
  text "P7.3" at 685,805 h19.68
  text "P7.1" at 785,805 h19.68
  text "P9.4" at 880,805 h19.68
  text "P9.6" at 980,805 h19.68
  text "P8.0" at 1080,805 h19.68
  text "P7.4" at 1180,805 h19.68
  text "P7.6" at 1280,805 h19.68
  text "P10.0" at 1370,805 h19.68
  text "P10.2" at 1475,805 h19.68
  text "P10.4" at 1580,805 h19.68
  text "GND" at 2390,635 h19.68
  text "P5.5" at 2490,635 h19.68
  text "3.3V" at 2590,635 h19.68
  text "P5.5" at 2810,635 h19.68
  text "P5.4" at 2915,635 h19.68
  text "P5.2" at 3015,635 h19.68
  text "P8.6" at 80,560 h19.68
  text "P8.7" at 180,560 h19.68
  text "P9.1" at 285,560 h19.68
  text "P8.2" at 390,560 h19.68
  text "P5.3" at 485,560 h19.68
  text "P9.3" at 590,560 h19.68
  text "P6.3" at 690,560 h19.68
  text "P7.2" at 785,560 h19.68
  text "P7.0" at 880,560 h19.68
  text "P9.5" at 980,560 h19.68
  text "P9.7" at 1080,560 h19.68
  text "P7.5" at 1190,560 h19.68
  text "P7.7" at 1290,560 h19.68
  text "P10.1" at 1380,560 h19.68
  text "P10.3" at 1480,560 h19.68
  text "P10.5" at 1585,560 h19.68
  text "P4.5" at 150,515 h19.68
  text "P4.4" at 250,515 h19.68
  text "P3.0" at 475,515 h19.68
  text "P2.3" at 575,515 h19.68
  text "P6.7" at 800,515 h19.68
  text "P6.6" at 900,515 h19.68
  text "P5.0" at 1130,515 h19.68
  text "P5.1" at 1225,515 h19.68
  text "GND" at 1410,305 h19.68
  text "GND" at 880,300 h19.68
  text "P8.7" at 670,225 h19.68
  text "P2.7" at 1080,225 h19.68
  text "P4.1" at 1205,225 h19.68
  text "P2.5" at 1615,225 h19.68
  text "P8.6" at 670,125 h19.68
  text "P2.6" at 1080,125 h19.68
  text "P3.6" at 1200,125 h19.68
  text "P2.4" at 1615,125 h19.68
  text "VCC" at 170,100 h19.68
  text "GND" at 270,100 h19.68
  text "P9.6" at 360,100 h19.68
  text "P9.7" at 465,100 h19.68
  text "GND" at 1415,45 h19.68
  text "GND" at 880,40 h19.68
Mechanical 1:
  the board outline again, w10